# EAGLE board ethernet_7 (EAGLE 6.2)
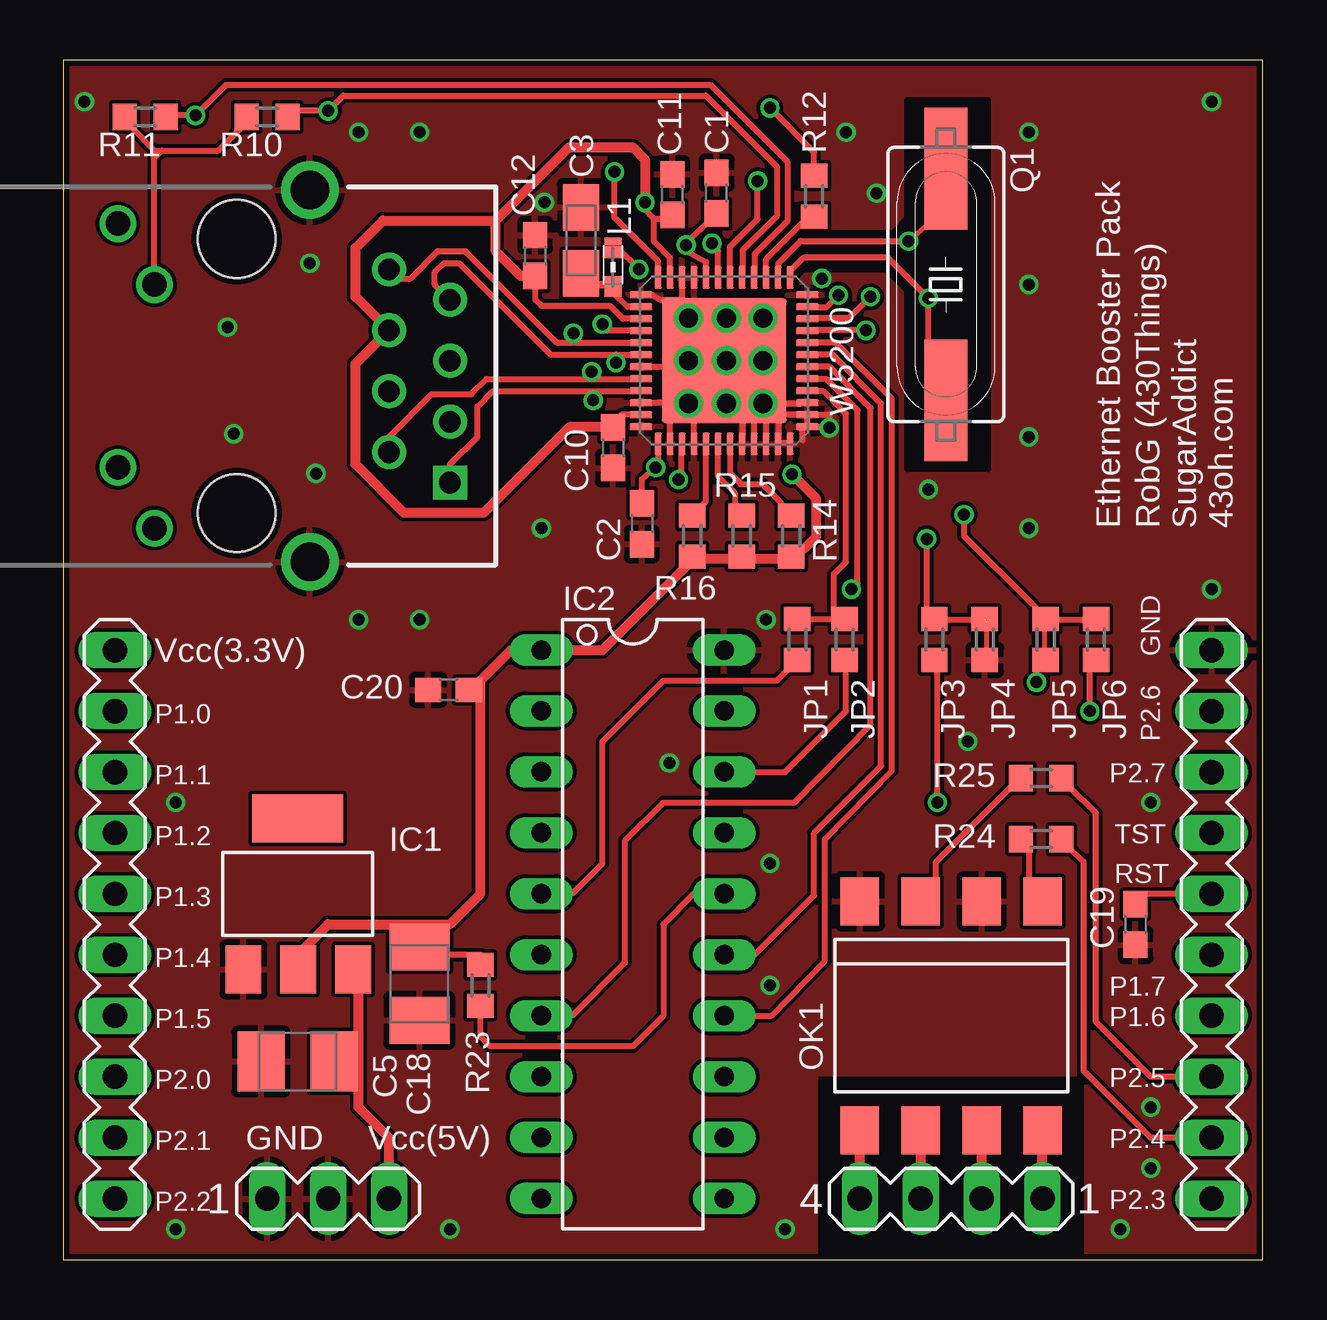
[diagram p0: board, top side]
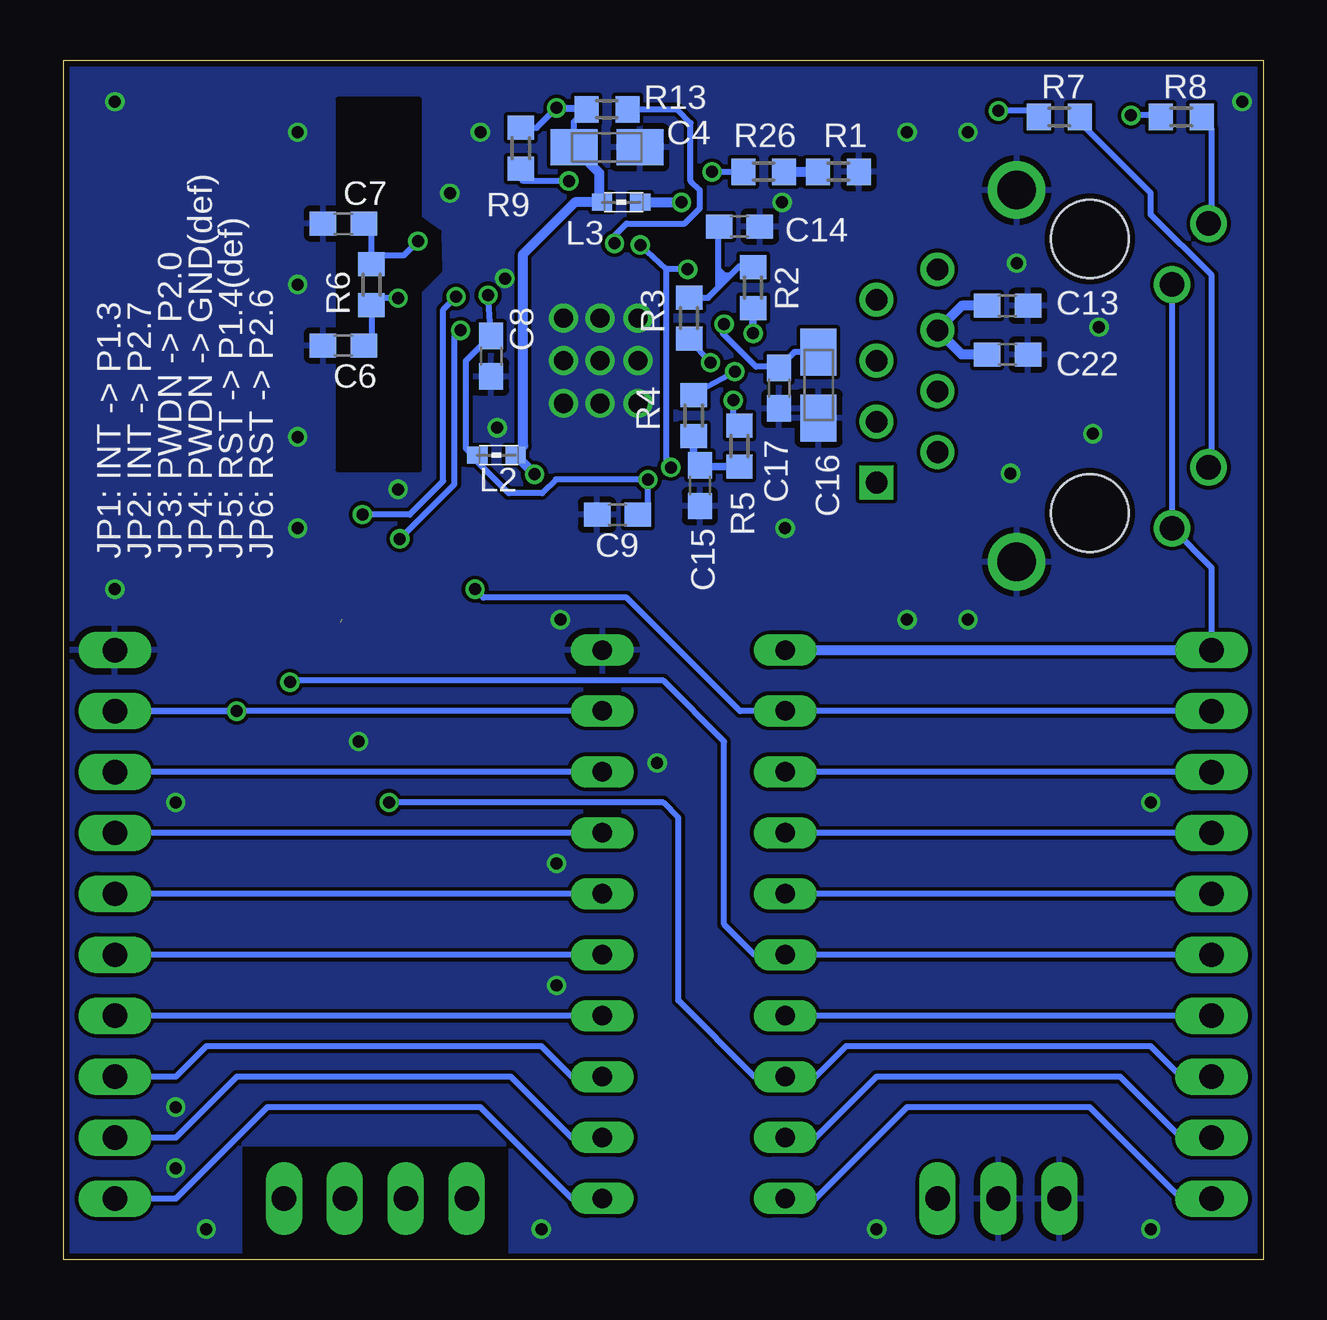
[diagram p1: board, bottom side, seen from below]

Size 50 x 50 mm. Coordinates in mm from the lower left corner, seen from the top.
Outline: 0,0 50,0 50,50 0,50 0,0
Copper layers (1*16): Top 0.035mm / dielectric 1.5mm / Bottom 0.035mm
Design rules: minimum track width 6mil, minimum drill 12mil, track to track 6mil, track to pad 6mil, pad to pad 6mil, via to via 6mil, smd to smd 0mil, copper to edge 10mil, drill to drill 10mil, minimum pad ring 10mil, minimum via ring 6mil, stop-mask expansion 2mil, vias tented up to drill 100mil, thermal gap 10mil
tRestrict: area 29.5,32.9 to 38.6,48.4; area 37.8,25.4 to 39,26.3; area 31.5,0 to 42.5,7.6; area 40.4,25.4 to 41.5,26.3; area 24.6,37.3 to 25,37.8; area 27.2,34.5 to 27.9,34.9; area 30.2,37.1 to 30.5,37.8; area 27.1,40.1 to 28.1,40.4
bRestrict: area 34.3,32.9 to 38.6,48.4; area 31.5,0 to 42.5,4.7

## Footprints (pad centres in the part's own frame; a part is rotated, then mirrored left to right if it is on the bottom)
C0603 = smd 1.1 x 1: 1 -0.85,0; 2 0.85,0
A/3216-18R = smd 1.95 x 1.5: + 1.375,0; - -1.375,0
B/3528-21R = smd 1.95 x 2.5: + 1.525,0; - -1.525,0
SOT223 = smd 1.499 x 2.007: 1 -2.261,-3.15; 2 0.025,-3.15; 3 2.311,-3.15 | smd 3.81 x 2.007: 4 0,3.15
N20 = drill 0.813 long: 1 -11.435,-3.81; 2 -8.895,-3.81; 3 -6.355,-3.81; 4 -3.815,-3.81; 5 -1.275,-3.81; 6 1.265,-3.81; 7 3.805,-3.81; 8 6.345,-3.81; 9 8.885,-3.81; 10 11.425,-3.81; 11 11.425,3.81; 12 8.885,3.81; 13 6.345,3.81; 14 3.805,3.81; 15 1.265,3.81; 16 -1.275,3.81; 17 -3.815,3.81; 18 -6.355,3.81; 19 -8.895,3.81; 20 -11.435,3.81
MA10-1-NOTXT = drill 1.016 long: 1 -11.43,0; 2 -8.89,0; 3 -6.35,0; 4 -3.81,0; 5 -1.27,0; 6 1.27,0; 7 3.81,0; 8 6.35,0; 9 8.89,0; 10 11.43,0
MA04-1 = drill 1.016 long: 1 -3.81,0; 2 -1.27,0; 3 1.27,0; 4 3.81,0
MA03-1 = drill 1.016 long: 1 -2.54,0; 2 0,0; 3 2.54,0
R0603 = smd 1 x 1.1: 1 -0.85,0; 2 0.85,0
0603 = smd 0.85 x 0.7: 1 -0.9,0; 2 0.7,0
DIL8-SMD = smd 1.6 x 2: 1 -3.81,-4.77; 2 -1.27,-4.77; 3 1.27,-4.77; 4 3.81,-4.77; 5 3.81,4.77; 6 1.27,4.77; 7 -1.27,4.77; 8 -3.81,4.77
SM49 = smd 5.08 x 1.778: 1 -4.826,0; 2 4.826,0
QFN48-3 = smd 0.94 x 0.3: 1 -3.467,2.75; 2 -3.466,2.25; 3 -3.466,1.75; 4 -3.466,1.25; 5 -3.466,0.75; 6 -3.466,0.25; 7 -3.466,-0.25; 8 -3.466,-0.75; 9 -3.466,-1.25; 10 -3.466,-1.75; 11 -3.466,-2.25; 12 -3.466,-2.75; 25 3.466,-2.75; 26 3.466,-2.25; 27 3.466,-1.75; 28 3.466,-1.25; 29 3.466,-0.75; 30 3.466,-0.25; 31 3.466,0.25; 32 3.466,0.75; 33 3.466,1.25; 34 3.466,1.75; 35 3.466,2.25; 36 3.466,2.75 | smd 0.3 x 0.94: 13 -2.75,-3.466; 14 -2.25,-3.466; 15 -1.75,-3.466; 16 -1.25,-3.466; 17 -0.75,-3.466; 18 -0.25,-3.466; 19 0.25,-3.466; 20 0.75,-3.466; 21 1.25,-3.466; 22 1.75,-3.466; 23 2.25,-3.466; 24 2.75,-3.466; 37 2.75,3.466; 38 2.25,3.466; 39 1.75,3.466; 40 1.25,3.466; 41 0.75,3.466; 42 0.25,3.466; 43 -0.25,3.466; 44 -0.75,3.466; 45 -1.25,3.466; 46 -1.75,3.466; 47 -2.25,3.466; 48 -2.75,3.466 | smd 5.207 x 5.207: EXP 0,0
RB1-125BAG1A = drill 1.02: L1 6.35,-3.429; L2 3.81,-4.953; L3 -3.81,-3.429; L4 -6.35,-4.953 | drill 0.9: R1 -4.445,6.35; R2 -3.175,8.89; R3 -1.905,6.35; R4 -0.635,8.89; R5 0.635,6.35; R6 1.905,8.89; R7 3.175,6.35 | drill 0.9 square: R8 4.445,8.89 | drill 1.6: SHIELD@1 -7.747,3.048; SHIELD@2 7.747,3.048 | hole 3.25: 5.715,0; -5.715,0

## Placement (x,y rotation side)
C1  [C0603]  27.24,44.45 90 top
C2  [C0603]  24.13,30.67 270 top
C3  [A/3216-18R]  21.59,42.48 270 top
C4  [A/3216-18R]  27.37,46.35 180 bottom
C5  [B/3528-21R]  9.78,8.26 0 top
C6  [C0603]  38.35,38.1 180 bottom
C7  [C0603]  38.35,43.18 180 bottom
C8  [C0603]  32.19,37.66 270 bottom
C9  [C0603]  26.92,31.05 180 bottom
C10  [C0603]  22.92,33.85 270 top
C11  [C0603]  25.4,44.39 90 top
C12  [C0603]  19.68,41.85 90 top
C13  [C0603]  10.67,39.75 0 bottom
C14  [C0603]  21.84,43.05 0 bottom
C15  [C0603]  23.5,32.26 270 bottom
C16  [A/3216-18R]  18.54,36.45 90 bottom
C17  [C0603]  20.19,36.32 270 bottom
C18  [B/3528-21R]  14.86,11.49 90 top
C19  [C0603]  44.7,13.97 270 top
C20  [C0603]  16.07,23.75 180 top
C22  [C0603]  10.67,37.72 0 bottom
IC1  REG1117  [SOT223]  9.78,15.24 0 top
IC2  [N20]  23.75,13.97 270 top
J1  [MA10-1-NOTXT]  2.16,13.97 270 top
J2  [MA10-1-NOTXT]  47.88,13.97 90 top
J4  [MA04-1]  37.02,2.54 180 top
J5  [MA03-1]  11.05,2.54 0 top
JP1  [R0603]  30.61,25.84 270 top
JP2  [R0603]  32.58,25.84 270 top
JP3  [R0603]  36.32,25.84 270 top
JP4  [R0603]  38.42,25.84 270 top
JP5  [R0603]  40.96,25.84 270 top
JP6  [R0603]  43.05,25.84 270 top
L1  [0603]  22.92,41.47 90 top
L2  [0603]  31.88,33.53 0 bottom
L3  [0603]  26.67,44.07 0 bottom
OK1  LTV826S  [DIL8-SMD]  37.02,10.16 180 top
Q1  [SM49]  36.8,40.64 270 top
R1  [R0603]  17.72,45.34 180 bottom
R2  [R0603]  21.27,40.51 90 bottom
R3  [R0603]  23.94,39.24 90 bottom
R4  [R0603]  23.75,35.18 270 bottom
R5  [R0603]  21.84,33.91 270 bottom
R6  [R0603]  37.18,40.64 90 bottom
R7  [R0603]  8.51,47.62 0 bottom
R8  [R0603]  3.43,47.62 0 bottom
R9  [R0603]  30.96,46.32 90 bottom
R10  [R0603]  8.51,47.62 180 top
R11  [R0603]  3.43,47.62 180 top
R12  [R0603]  31.31,44.32 90 top
R13  [R0603]  27.37,47.94 180 bottom
R14  [R0603]  30.35,30.16 90 top
R15  [R0603]  28.29,30.16 90 top
R16  [R0603]  26.23,30.16 90 top
R23  [R0603]  17.4,11.43 90 top
R24  [R0603]  40.77,17.53 180 top
R25  [R0603]  40.77,20.07 180 top
R26  [R0603]  20.83,45.34 180 bottom
W5200  W52003  [QFN48-3]  27.56,37.47 270 top
X1  RB1-125BAG1A  [RB1-125BAG1A]  7.24,36.83 270 top

## Library data of the parts
C1-C20 C22 JP1-JP6 R1-R16 R23-R26 = rcl
IC1 = burr-brown
IC2 = ti_msp430g
J1 J2 J4 J5 = con-lstb
L1-L3 = wuerth-elektronik
OK1 = optocoupler
Q1 = crystal
W5200 X1 = Rob's Library

## Nets
1V8OUT: C3.+ L1.1 W5200.14
BIAS: R26.2 W5200.12
GND: C1.2 C2.2 C3.- C4.- C5.- C6.2 C7.2 C8.2 C9.2 C10.2 C11.2 C12.2 C13.2 C14.2 C15.2 C16.- C17.2 C18.- C19.2 C20.2 C22.2 IC1.1 IC2.20 J2.10 J5.1 J5.2 JP4.2 OK1.2 OK1.4 R1.1 W5200.9 W5200.10 W5200.13 W5200.19 W5200.22 W5200.24 W5200.26 W5200.28 W5200.32 W5200.33 W5200.34 W5200.35 W5200.36 W5200.37 W5200.38 W5200.39 W5200.48 W5200.EXP X1.SHIELD@1 X1.SHIELD@2
INT: JP1.1 JP2.1 W5200.40
M2: R12.1 W5200.3
M3: R9.1 W5200.6
MISO: IC2.14 J2.4 W5200.44
MOSI: IC2.15 J2.5 W5200.43
MSPRST: C19.1 IC2.16 J2.6 R23.1
N$1: J4.2 OK1.7
N$2: J4.1 OK1.8
N$3: IC2.3 J1.3
N$4: IC2.4 J1.4
N$5: J4.3 OK1.6
N$6: J4.4 OK1.5
N$7: OK1.1 R24.2
N$8: OK1.3 R25.2
N$9: R1.2 R26.1
N$11: IC2.17 J2.7
N$16: IC2.9 J1.9
N$17: IC2.10 J1.10
N$20: IC2.11 J2.1
N$21: R7.2 X1.L2
N$22: R8.2 X1.L4
N$30: R14.2 W5200.31
N$31: R15.2 W5200.30
N$32: C14.1 R2.2 R3.2
N$33: C15.1 R4.2 R5.2
N$34: R16.2 W5200.29
NLINK: R7.1 R10.1 W5200.5
NSPD: R8.1 R11.1 W5200.4
P1.3: IC2.5 J1.5 JP1.2
P1.4: IC2.6 J1.6 JP5.2
P2.0: IC2.8 J1.8 JP3.2
P2.4: IC2.12 J2.2 R24.1
P2.5: IC2.13 J2.3 R25.1
P2.6: IC2.19 J2.9 JP6.2
P2.7: IC2.18 J2.8 JP2.2
PWDN: JP3.1 JP4.1 W5200.45
RST: JP5.1 JP6.1 W5200.46
RSV: R13.1 W5200.7
RXIN: R5.1 W5200.21 X1.R8
RXIP: R4.1 W5200.20 X1.R7
SCLK: IC2.7 J1.7 W5200.42
SCS: IC2.2 J1.2 W5200.41
TXON: R3.1 W5200.18 X1.R2
TXOP: R2.1 W5200.17 X1.R1
UVCC: C5.+ IC1.3 J5.3
VCC: C4.+ C18.+ C20.1 IC1.2 IC2.1 J1.1 L2.2 L3.1 R9.2 R10.2 R11.2 R12.2 R13.2 R14.1 R15.1 R16.1 R23.2 X1.L1 X1.L3
VCC1V8: C1.1 C2.1 L1.2 W5200.8 W5200.25
VCC3V3: C8.1 C9.1 L2.1 W5200.27 W5200.47
VCC3V3A: C10.1 C11.1 C12.1 C13.1 C22.1 L3.2 W5200.11 W5200.15 W5200.23 X1.R3
XIN: C6.1 Q1.2 R6.1 W5200.1
XOUT: C7.1 Q1.1 R6.2 W5200.2
XTALVDD: C16.+ C17.1 W5200.16

## Tracks (layer width: path | path; a pad name or v marks a point on that pad's centre or on a via)
1V8OUT
  Top 0.254: W5200.14 23.53,39.72 22.93,40.31 | C3.+ 21.59,40.64
  Top 0.305: 21.59,40.64 22.72,40.64 L1.1 22.93,40.31
BIAS  (via drill 0.5)
  Top 0.254: W5200.12 24.81,41.61 22.99,43.43 v22.99,45.34
  Bottom 0.254: v22.99,45.34 21.97,45.34
  Bottom 0.406: R26.2 21.97,45.34
GND  (via drill 0.5, 0.8)
  Top 0.203: 30.32,34.26 W5200.36 | 29.05,35.56 28.8,35.02 | 29.05,35.56 29.81,35.18 | 25.81,39.85 26.32,39.81 26.29,39.37 | 28.32,35.08 28.64,35.56 29.05,35.56 | 29.81,34.07 30.32,34.1 | 29.3,35.18 29.05,35.56
  Top 0.254: 25.27,35.69 25.27,36.32 25.34,37.21 25.33,37.22 W5200.19 | 30.99,35.69 W5200.39 30.73,35.69 29.72,35.69 29.05,35.56 | 28.32,35.08 28.32,33.81 | 28.8,35.02 28.8,33.81 | 29.3,35.18 29.3,33.85 | 29.81,35.18 29.81,34.07 | 30.32,34.1 30.32,34.26 | W5200.10 25.81,39.85 | 25.81,39.85 | W5200.13 24.55,40.22 24.89,40.01 25.65,40.01 25.81,39.85 | 25.27,35.69 25.25,35.72 W5200.22 25.4,35.75 26.29,35.56 | W5200.38 29.88,35.22 29.84,35.18 | W5200.37 W5200.38 | W5200.38 31.94,35.22 v31.94,34.67 31.94,34.71 30.82,34.71 30.82,34.14 | W5200.26 25.31,35.14 | 25.31,35.14 25.27,35.18 25.27,35.69 | W5200.28 26.31,35.03 26.16,35.18 26.13,35.14 25.31,35.14
  Top 0.406: v26.07,39.24 26.29,39.24 26.29,39.37
  other vias: 27.65,39.24 27.65,37.46 27.65,35.69 14.86,46.99 12.32,46.99 12.32,26.67 14.86,26.67 6.86,38.86 40.26,46.99 32.64,46.99 40.26,34.29 40.26,30.48 40.26,40.64 33.91,44.45 19.94,30.48 10.29,41.53 7.11,34.42 10.54,32.77 29.46,16.51 25.27,20.7 29.46,11.43 29.31,26.67 37.72,21.59 36.07,32.1 4.7,19.05 44.07,1.27 16.13,1.27 4.7,1.27 30.1,1.27 47.88,27.94 47.88,48.26 0.89,48.26 20.07,44.07 31.62,40.89 45.34,6.35 45.34,19.05 45.34,3.81 29.18,39.24 26.07,37.46 29.18,37.46 29.18,35.69 26.07,35.69
  pour Top: 0,49.91 50.04,50.04 50.04,0 0,0
  pour Bottom: 0,49.91 50.04,50.04 50.04,0 0,0
INT
  Top 0.203: 30.99,36.2 W5200.40
  Top 0.254: 30.99,36.2 31.69,36.2 32.38,35.5 32.64,35.24 32.64,29.08 32.13,28.57 32.13,26.67 32.41,26.7 JP2.1 JP1.1
M2
  Top 0.254: W5200.3 29.31,41.69 31.3,43.69 | 31.3,43.69 31.37,43.56 | R12.1 31.3,43.69
M3  (via drill 0.5)
  Top 0.254: W5200.6 27.81,42.22 28.96,43.37 v28.96,44.96
  Bottom 0.254: v28.96,44.96 30.86,44.96 30.96,45.05 R9.1
MISO
  Top 0.203: 30.99,38.23 W5200.44
  Top 0.254: 30.99,38.23 32.19,38.23 34.54,35.88 34.54,20.38 31.75,17.53 31.75,12.45 29.53,10.16 IC2.14
  Bottom 0.254: IC2.14 J2.4
MOSI
  Top 0.203: 30.99,37.72 W5200.43
  Top 0.254: 30.99,37.72 32.07,37.72 34.1,35.69 34.1,20.57 31.3,17.78 31.3,15.18 28.83,12.7 IC2.15
  Bottom 0.254: IC2.15 J2.5
MSPRST
  Top 0.203: 45.09,15.24 C19.1
  Top 0.254: J2.6 46.61,15.24 45.09,15.24 | IC2.16 26.29,15.24 25.02,13.97 25.02,10.16 23.75,8.89 17.78,8.89 17.4,9.27 R23.1
  Bottom 0.254: IC2.16 J2.6
N$1
  Top 0.406: J4.2 OK1.7
N$2
  Top 0.406: J4.1 OK1.8
N$3
  Bottom 0.254: J1.3 IC2.3
N$4
  Bottom 0.254: J1.4 IC2.4
N$5
  Top 0.406: J4.3 OK1.6
N$6
  Top 0.406: J4.4 OK1.5
N$7
  Top 0.254: OK1.1 40.26,15.24 40.26,17.53 R24.2
N$8
  Top 0.254: OK1.3 36.39,15.18 36.39,16.57 39.5,19.68 R25.2
N$9
  Bottom 0.406: R26.1 R1.2
N$11
  Bottom 0.254: IC2.17 J2.7
N$16
  Bottom 0.254: J1.9 3.43,5.08 5.97,7.62 16.13,7.62 18.67,5.08 IC2.9
N$17
  Bottom 0.254: J1.10 3.43,2.54 7.24,6.35 14.86,6.35 18.67,2.54 IC2.10
N$20
  Bottom 0.254: IC2.11 28.83,2.54 32.64,6.35 41.53,6.35 45.34,2.54 J2.1
N$21
  Bottom 0.203: 7.49,47.24 R7.2
  Bottom 0.254: X1.L2 2.16,33.02 2.16,41.02 4.7,43.56 4.7,44.45 7.49,47.24
N$22
  Bottom 0.254: X1.L4 2.16,43.18 2.16,47.12 R8.2
N$30
  Top 0.203: 27.81,33.91 W5200.31
  Top 0.254: 27.81,33.91 27.81,32.77 28.26,32.32 29.15,32.32 29.94,31.53 29.94,31.37 R14.2
N$31
  Top 0.203: 28,31.37 R15.2 | 27.3,33.91 W5200.30
  Top 0.254: 27.3,33.91 27.3,32.64 28,31.94 28,31.37
N$32
  Bottom 0.254: R3.2 23.15,40.09 22.73,40.51 | 22.73,40.51 22.48,40.77 | 22.48,40.77 22.23,41.02 | 22.23,41.02 21.82,41.43 R2.2 | C14.1 22.69,42.84 22.73,42.8 22.73,41.27 | 22.73,41.27 22.73,41.02 | 22.73,41.02 22.73,40.51 | 22.48,40.77 22.73,41.02 | 22.73,41.27 22.48,41.02 22.23,41.02
N$33
  Bottom 0.305: R4.2 23.75,33.27 C15.1 23.75,33.15 23.66,33.06 R5.2
N$34
  Top 0.203: 26.8,33.97 W5200.29
  Top 0.254: R16.2 26.8,31.59 26.8,33.97
NLINK  (via drill 0.5)
  Top 0.203: 28.32,40.89 W5200.5
  Top 0.254: 28.32,40.89 28.32,42.07 29.75,43.5 29.75,45.56 26.8,48.51 11.68,48.51 v11.05,47.88 9.59,47.88 R7.1
  Bottom 0.203: R7.1 9.53,47.88
  Bottom 0.254: 9.53,47.88 v11.05,47.88
NSPD  (via drill 0.5)
  Top 0.203: 28.83,40.89 W5200.4
  Top 0.254: 28.83,40.89 28.83,41.91 30.19,43.27 30.19,45.75 26.99,48.96 6.79,48.96 v5.52,47.69 4.7,47.69 R8.1
  Bottom 0.254: R8.1 4.57,47.69 v5.52,47.69
P1.3
  Top 0.254: JP1.2 29.75,24.13 25.02,24.13 22.48,21.59 22.48,16.51 21.21,15.24 IC2.5
  Bottom 0.254: J1.5 IC2.5
P1.4  (via drill 0.5)
  Top 0.203: 40.58,24.51 JP5.2
  Top 0.254: v40.58,24.07 40.58,24.51
  Bottom 0.254: J1.6 IC2.6 21.21,12.7 22.48,13.97 22.48,21.59 25.02,24.13 40.26,24.13 v40.58,24.07
P2.0  (via drill 0.5)
  Top 0.203: 36.45,24.51 JP3.2
  Top 0.254: v36.45,19.05 36.45,24.51
  Bottom 0.254: J1.8 3.43,7.62 4.7,8.89 17.4,8.89 18.67,7.62 IC2.8 21.21,7.62 24.38,10.79 24.38,18.41 25.02,19.05 v36.45,19.05
P2.4
  Top 0.254: R24.1 41.66,17.27 41.97,17.14 42.55,16.57 42.55,7.87 45.34,5.08 J2.2
  Bottom 0.254: IC2.12 28.83,5.08 31.37,7.62 42.8,7.62 45.34,5.08 J2.2
P2.5
  Top 0.254: R25.1 41.97,19.68 43.05,18.61 43.05,9.91 45.34,7.62 J2.3
  Bottom 0.254: IC2.13 28.83,7.62 30.1,8.89 44.07,8.89 45.34,7.62 J2.3
P2.6  (via drill 0.5)
  Top 0.254: v42.8,22.86 42.8,24.64 JP6.2
  Bottom 0.254: IC2.19 J2.9 v42.8,22.86
P2.7
  Top 0.254: IC2.18 30.1,20.32 32.64,22.86 32.64,24.89 JP2.2
  Bottom 0.254: IC2.18 J2.8
PWDN  (via drill 0.5)  (1 unrouted)
  Top 0.203: 30.99,38.73 W5200.45 | JP3.1 36.32,26.67 | 38.48,26.54 38.48,25.4
  Top 0.254: v33.47,38.73 30.99,38.73 | v36.01,30.04 36.01,27.11 36.32,26.67 38.42,26.67 JP4.1
  Bottom 0.254: v33.47,38.73 33.72,38.48 33.72,32.32 v36.01,30.04
RST  (via drill 0.5)
  Top 0.203: 30.99,39.24 W5200.46 | JP5.1 40.89,26.67 40.89,25.4 | 40.39,27.34 40.77,26.96 40.61,27.05
  Top 0.254: v33.66,40.13 32.77,39.24 30.99,39.24 | 40.39,27.34 37.56,30.16 v37.56,31.05 | JP6.1 42.86,26.67 40.89,26.67 40.61,27.05
  Bottom 0.254: v37.56,31.05 35.59,31.05 34.2,32.45 34.2,39.59 v33.66,40.13
RSV  (via drill 0.5)
  Top 0.254: W5200.7 27.31,42.03 v27.05,42.35
  Bottom 0.254: v27.05,42.35 27.05,42.67 26.54,43.18 24.13,43.18 23.5,43.81 23.5,44.58 23.88,44.96 23.88,47.37 24.45,47.94 R13.1
RXIN  (via drill 0.5)
  Top 0.254: X1.R8 16.13,33.15 17.27,34.29 17.27,35.56 17.91,36.2 22.1,36.2 | 22.1,36.2 24.13,36.2 W5200.21 | v22.1,35.81 22.1,36.2
  Bottom 0.254: R5.1 22.1,35.05 v22.1,35.81
RXIP  (via drill 0.5)
  Top 0.254: 22.04,36.7 17.65,36.7 17.02,36.07 15.37,36.07 13.59,34.29 X1.R7 | 22.04,36.7 24.19,36.7 W5200.20 | v22.04,37.01 22.04,36.7
  Bottom 0.254: R4.1 23.43,36.26 v22.04,37.01
SCLK
  Top 0.203: 30.99,37.21 W5200.42
  Top 0.254: 30.99,37.21 31.94,37.21 33.66,35.5 33.66,22.29 30.48,19.05 25.02,19.05 23.43,17.46 23.43,12.38 21.21,10.16 IC2.7
  Bottom 0.203: IC2.7
  Bottom 0.254: J1.7 IC2.7
SCS  (via drill 0.5)
  Top 0.203: 30.99,36.7 W5200.41
  Top 0.254: 30.99,36.7 31.81,36.7 33.12,35.4 33.12,28.19 v32.86,27.94
  Bottom 0.254: J1.2 IC2.2 21.81,22.86 26.54,27.59 32.51,27.59 v32.86,27.94
TXON  (via drill 0.5)
  Top 0.254: X1.R2 15.49,40.64 15.49,41.15 15.88,41.53 16.51,41.53 20.32,37.72 23.05,37.72 | 23.05,37.72 24.13,37.72 W5200.18 | v23.05,37.39 23.05,37.72
  Bottom 0.254: R3.1 v23.05,37.39
TXOP  (via drill 0.5)
  Top 0.254: 21.27,38.23 20.57,38.23 16.76,42.04 15.62,42.04 14.48,40.89 13.97,40.89 X1.R1 | 21.27,38.23 24.13,38.23 W5200.17 | v21.27,38.61 21.27,38.23
  Bottom 0.305: R2.1 v21.27,38.61
UVCC
  Top 0.406: J5.3 13.59,5.08 12.32,6.35 12.32,7.62 | 12.32,7.62 12.32,11.43 | 12.32,7.62 C5.+
  Top 0.61: 12.32,11.43 IC1.3
VCC  (via drill 0.5)
  Top 0.203: 2.86,47.18 R11.2 | R15.1 28.57,29.21 | 30.48,29.21 R14.1 | R16.1 26.73,29.21
  Top 0.254: X1.L3 3.81,45.91 | 3.81,45.91 3.81,46.23 | 3.81,46.23 2.86,47.18 | 3.81,46.23 4.13,46.23 | 4.13,46.23 6.48,46.23 7.37,47.12 R10.2 | 3.81,45.91 4.13,46.23 | 17.4,24.13 C20.1 | R12.2 31.3,46.16 v29.46,48.01 | R23.2 17.4,12.7 15.24,12.7 16.13,13.97 C18.+
  Top 0.406: 28.57,29.21 30.48,29.21 | 26.73,29.21 28,29.21 R15.1 | R16.1 26.16,29.21 25.97,28.89 22.48,25.4 21.21,25.4 IC2.1 18.67,25.4 17.4,24.13 17.4,15.24 16.13,13.97 11.05,13.97 9.78,12.7 IC1.2 | R14.1 30.96,29.69 31.4,30.13 31.4,31.72 v30.39,32.73
  Bottom 0.254: X1.L3 X1.L1 2.16,28.83 J1.1 | v29.46,48.01 28.45,48.01 | v29.46,48.01 29.4,47.94 R13.2 28.74,47.42 C4.+ | R9.2 30.3,47.17 v29.46,48.01
  Bottom 0.406: IC2.1 J1.1 | v30.39,32.73 L2.2 30.86,33.91 30.86,38.7 30.86,41.91 28.7,44.07 27.69,44.07 | 27.69,44.07 L3.1 | C4.+ 27.69,45.3 27.69,44.07
VCC1V8  (via drill 0.5)
  Top 0.254: L1.2 23.11,42.17 v24,41.27 | C1.1 27.3,43.37 26.92,43.31 26.1,42.48 25.97,42.23 v25.97,42.29 25.97,42.04 26.81,41.58 W5200.8 | W5200.25 24.81,33.48 24.83,33.15 v24.7,33.02 24.13,32.51 C2.1
  Bottom 0.254: v24,41.27 24.89,41.27 | 24.89,41.27 v25.97,42.29 | v24.7,33.02 24.89,33.21 24.89,41.27
VCC3V3  (via drill 0.5)
  Top 0.254: W5200.47 30.99,39.69 31.81,39.69 v32.32,40.2 | W5200.27 25.78,33.97 25.78,32.77 v25.65,32.51
  Bottom 0.203: C9.1 25.65,31.3
  Bottom 0.254: v32.32,40.2 C8.1 33.24,37.47 33.24,37.15 33.24,33.81 32.84,33.33 | 25.65,31.3 v25.65,32.51 26.32,32.51 29.5,32.51 30.07,31.94 31.46,31.94 32.84,33.33 | 32.84,33.33 L2.1
VCC3V3A  (via drill 0.5)
  Top 0.254: C12.1 19.68,40.01 19.94,39.75 22.8,39.75 23.33,39.22 W5200.15 | 25.17,43.35 25.15,43.35 25.15,43.37 24.64,43.37 | 24.64,43.37 24.26,43.75 v24.26,44.07 | W5200.11 25.31,41.75 24.64,42.42 24.64,43.37 | W5200.23 23.28,35.22 23.27,34.7 C10.1
  Top 0.305: C11.1 25.17,43.35
  Top 0.406: C12.1 19.07,41 18.03,42.04 18.03,43.31 | 18.03,43.31 21.08,46.35 23.75,46.35 24.26,45.85 v24.26,44.07 | 18.03,43.31 13.34,43.31 12.19,42.16 12.19,40.13 X1.R3 12.19,37.34 12.19,33.15 14.22,31.11 17.53,31.11 21.11,34.7 C10.1
  Bottom 0.406: C22.1 12.57,37.72 X1.R3 12.57,39.75 C13.1 | L3.2 v24.26,44.07
XIN  (via drill 0.5)
  Top 0.203: Q1.2 36.07,38.32
  Top 0.254: W5200.1 30.32,40.86 30.32,41.21 30.86,41.75 34.38,41.75 v36.07,40.08 36.07,38.32
  Bottom 0.254: C6.1 37.18,38.29 R6.1 | R6.1 37.4,39.69 37.53,39.62 | v36.07,40.08 37.02,40.07 37.27,39.69 37.53,39.62 | 37.53,39.62 R6.1
XOUT  (via drill 0.5)
  Top 0.203: W5200.2 | v35.24,42.45 36.13,43.24 Q1.1
  Top 0.254: W5200.2 29.81,41.53 30.73,42.45 v35.24,42.45
  Bottom 0.203: 37.18,42.93 C7.1 | 37.27,41.85 37.18,41.72
  Bottom 0.254: 37.18,42.93 37.18,41.72 R6.2 | v35.24,42.45 35.85,41.85 37.27,41.85
XTALVDD  (via drill 0.5)
  Top 0.254: W5200.16 22.69,38.72 v22.48,38.99
  Bottom 0.254: v22.48,38.99 22.54,38.61 21.14,37.21 20.32,37.21 | C16.+ 19.54,37.82 C17.1
  Bottom 0.305: C17.1 20.28,37.17 20.32,37.21

## Text on the board
tNames: Ethernet Booster Pack | RobG (430Things) | SugarAddict | 43oh.com | Vcc(3.3V) | GND | P1.0 | P2.6 | P2.7 | P1.1 | TST | P1.2 | RST | P1.3 | P1.4 | P1.7 | P1.6 | P1.5 | P2.5 | P2.0 | P2.1 | GND | Vcc(5V) | P2.4 | P2.3 | P2.2
bNames: JP6: RST -> P2.6 | JP5: RST -> P1.4(def) | JP4: PWDN -> GND(def) | JP3: PWDN -> P2.0 | JP2: INT -> P2.7 | JP1: INT -> P1.3